# EAGLE board lv2-recovery (EAGLE 4.09), part 1 of 2
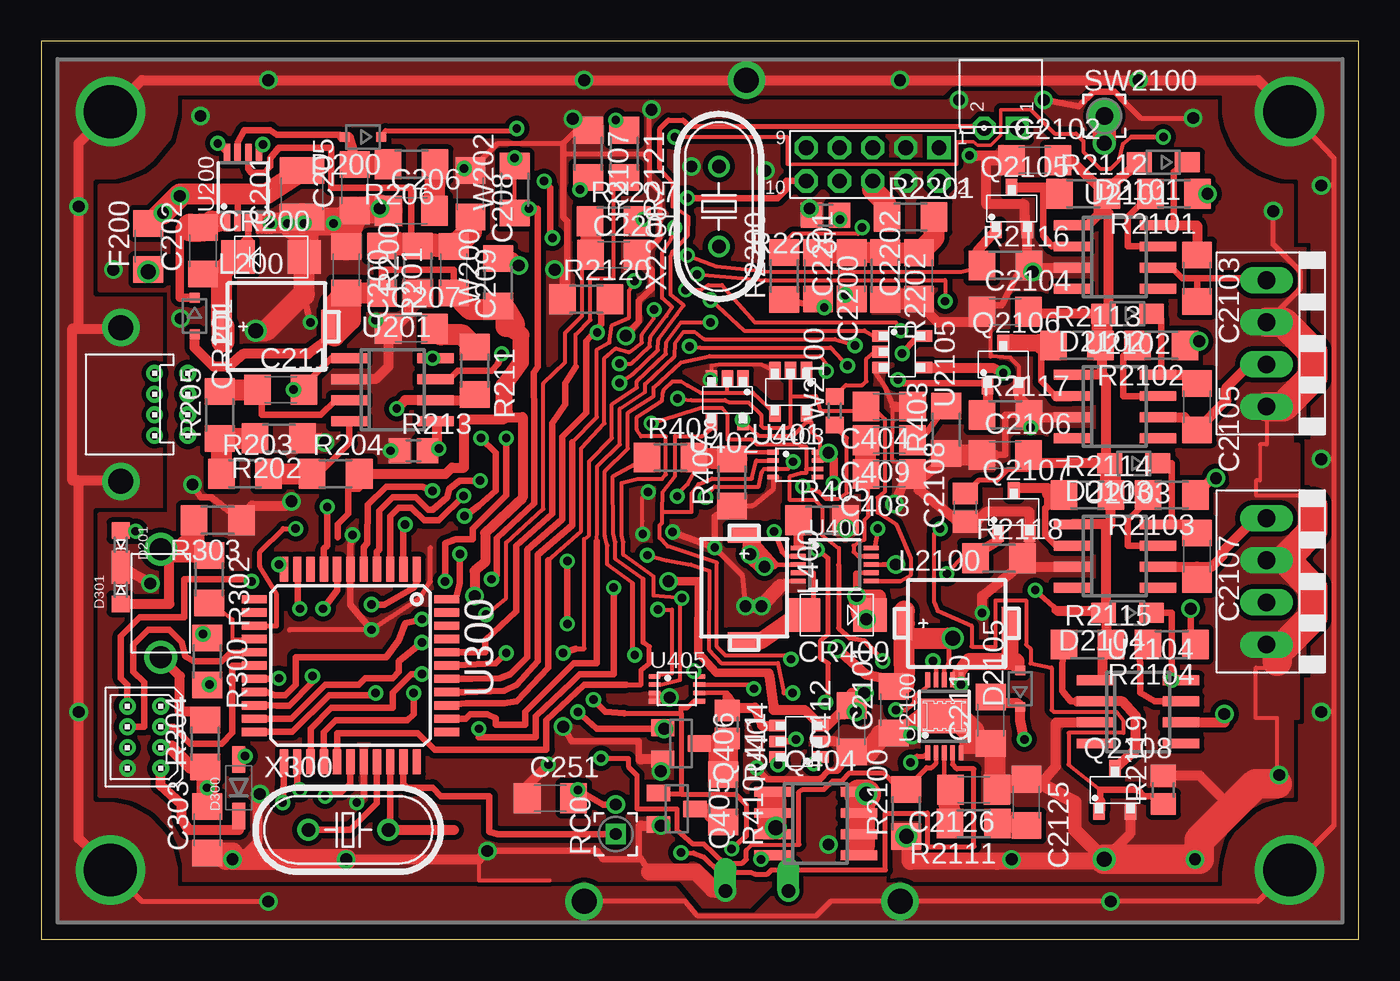
[diagram p0: board, top side]
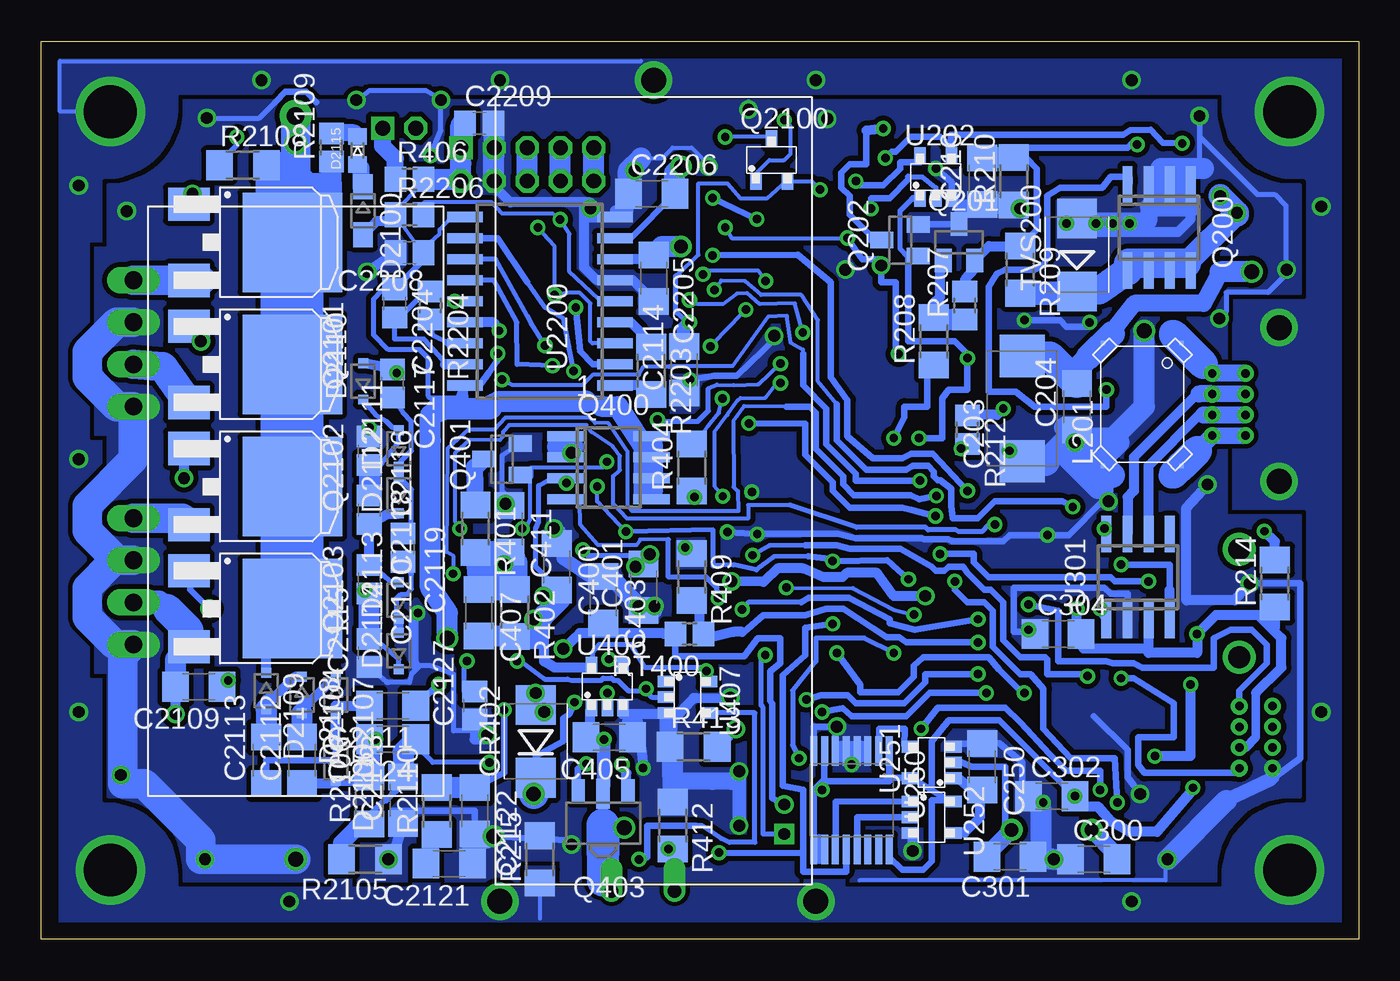
[diagram p1: board, bottom side, seen from below]

Size 79.43 x 54.14 mm. Coordinates in mm from the lower left corner, seen from the top.
Outline: 0,0 79.43,0 79.43,54.14 0,54.14 0,0
Copper layers used: Top, Bottom
tKeepout: area 72.1,46.7 to 78.4,53.1; area 72.1,1 to 78.4,7.4; area 1,46.7 to 7.3,53.1; area 1,1 to 7.3,7.4
tRestrict: 5 lines

## Footprints (pad centres in the part's own frame; a part is rotated, then mirrored left to right if it is on the bottom)
UF611948 = drill 0.813 pad 1.27 offset: B+ -24.13,2.54; B- -24.13,-1.27
C1206 = smd 1.6 x 1.8: 1 -1.4,0; 2 1.4,0
C1210 = smd 1.6 x 2.7: 1 -1.4,0; 2 1.4,0
D/7343-31R = smd 2.55 x 2.7: + 3.175,0; - -3.175,0
230C1B106K = drill 0.889 round: 1 -21.59,0; 2 21.59,0
C0805 = smd 1.3 x 1.5: 1 -0.85,0; 2 0.85,0
JST-08R-JED = drill 0.508 pad 1.016 round: 1 1.875,1; 2 1.875,-1; 3 0.625,1; 4 0.625,-1; 5 -0.625,1; 6 -0.625,-1; 7 -1.875,1; 8 -1.875,-1
PHEONIX-2.54-PITCH-EUROBLOCK = drill 1.067 long: 1 0,3.81; 2 0,1.27; 3 0,-1.27; 4 0,-3.81
CAN_NODE = drill 0.508 pad 1.016 round: B+@1 2,1.875; B+@2 0,1.875; B-@7 2,-1.875; B-@8 0,-1.875; CANH@3 2,0.625; CANH@4 0,0.625; CANL@5 2,-0.625; CANL@6 0,-0.625 | drill 1.511 round: CHASSIS@1 -2.032,4.636; CHASSIS@2 -2.032,-4.636
2MM-2X5-HEADER = drill 0.889 pad 1.321 square: 1 -4,-1 | drill 0.889 pad 1.321 octagon: 2 -4,1; 3 -2,-1; 4 -2,1; 5 0,-1; 6 0,1; 7 2,-1; 8 2,1; 9 4,-1; 10 4,1
NMINIP2-J1 = smd 2 x 2: A 2,0; C -2,0
SOD323-R = smd 0.6 x 0.6: A 1.1,0; C -1.1,0
NMINIP2-J1@1 = smd 2 x 2: A 2,0; K -2,0
SMB = smd 2.4 x 2.4: 1 -2.2,0; 2 2.2,0
0603-DIODE = smd 1 x 1.1: A -0.85,0; K 0.85,0
SOD-123-DIODE = smd 1.6 x 0.8: 1(CATHODE) -1.7,0; 2(ANODE) 1.7,0
SOD323-W = smd 1.5 x 1.2: A 1.45,0; C -1.45,0
1206 = smd 1.6 x 1.8: 1 -1.4,0; 2 1.4,0
2MM-1X2-RIGHTANGLE-RECEPTACLE = drill 0.889 square: 1 0,-1 | drill 0.889 octagon: 2 0,1
MP2A = smd 1.05 x 2: P1 -3.225,0; P2 3.225,0
CMS1 = smd 0.254 x 0.254: 1 3.708,-2.362; 2 3.708,2.362; 3 -3.708,2.362; 4 -3.708,-2.362
SO8 = smd 0.6 x 2.2: 1 -1.905,-2.6; 2 -0.635,-2.6; 3 0.635,-2.6; 4 1.905,-2.6; 5 1.905,2.6; 6 0.635,2.6; 7 -0.635,2.6; 8 -1.905,2.6
SOT23 = smd 1 x 1.4: 1 -0.95,-1.1; 2 0.95,-1.1; 3 0,1.1
SO8@1 = smd 0.6 x 2.2: 1 -1.905,-2.6; 2 -0.635,-2.6; 3 0.635,-2.6; 4 1.905,-2.6; 5 1.905,2.6; 6 0.635,2.6; 7 -0.635,2.6; 8 -1.905,2.6
SOT89 = smd 0.8 x 1.4: 1 -1.499,-1.981; 3 1.499,-1.981 | smd 0.8 x 1.8: 2 0,-1.8
SOT23-3 = smd 0.7 x 1: 1 -0.95,-1.3; 2 0.95,-1.3; 3 0,1.3
TO-252 = smd 2 x 2.5: 1 -2.3,-2.25; 3 2.3,-2.25 | smd 6 x 6: 4 0,4
R1206 = smd 1.6 x 1.803: 1 -1.422,0; 2 1.422,0
R0805 = smd 1.3 x 1.5: 1 -0.85,0; 2 0.85,0
PAD_SQUARE_APC-FREE_0.1/028 = drill 0.711 pad 1.168 square: PAD 0,0
SW_6X3.5MM = drill 1.321 round: 1 -3.25,0; 2 3.25,0
PAD_ROUND_APC-FREE_0.1/042 = drill 1.067 pad 1.93 round: PAD 0,0
SMB' = smd 2.4 x 2.4: A 2.2,0; C -2.2,0
MSOP8 = smd 0.4 x 1.2: 1 -0.975,-2.05; 2 -0.325,-2.05; 3 0.325,-2.05; 4 0.975,-2.05; 5 0.975,2.05; 6 0.325,2.05; 7 -0.325,2.05; 8 -0.975,2.05
SOT23-5 = smd 0.7 x 1: 1 -0.95,-1.3; 2 0,-1.3; 3 0.95,-1.3; 4 0.95,1.3; 5 -0.95,1.3
TSSOP-16 = smd 0.42 x 1.78: 1 -2.275,-2.97; 2 -1.625,-2.97; 3 -0.975,-2.97; 4 -0.325,-2.97; 5 0.325,-2.97; 6 0.975,-2.97; 7 1.625,-2.97; 8 2.275,-2.97; 9 2.275,2.97; 10 1.625,2.97; 11 0.975,2.97; 12 0.325,2.97; 13 -0.325,2.97; 14 -0.975,2.97; 15 -1.625,2.97; 16 -2.275,2.97
TQFP44 = smd 1.5 x 0.5: 1 -5.8,4; 2 -5.8,3.2; 3 -5.8,2.4; 4 -5.8,1.6; 5 -5.8,0.8; 6 -5.8,0; 7 -5.8,-0.8; 8 -5.8,-1.6; 9 -5.8,-2.4; 10 -5.8,-3.2; 11 -5.8,-4; 23 5.8,-4; 24 5.8,-3.2; 25 5.8,-2.4; 26 5.8,-1.6; 27 5.8,-0.8; 28 5.8,0; 29 5.8,0.8; 30 5.8,1.6; 31 5.8,2.4; 32 5.8,3.2; 33 5.8,4 | smd 0.5 x 1.5: 12 -4,-5.8; 13 -3.2,-5.8; 14 -2.4,-5.8; 15 -1.6,-5.8; 16 -0.8,-5.8; 17 0,-5.8; 18 0.8,-5.8; 19 1.6,-5.8; 20 2.4,-5.8; 21 3.2,-5.8; 22 4,-5.8; 34 4,5.8; 35 3.2,5.8; 36 2.4,5.8; 37 1.6,5.8; 38 0.8,5.8; 39 0,5.8; 40 -0.8,5.8; 41 -1.6,5.8; 42 -2.4,5.8; 43 -3.2,5.8; 44 -4,5.8
LTMSOP10 = smd 0.279 x 0.9: 1 -1,-2.2; 2 -0.5,-2.2; 3 0,-2.2; 4 0.5,-2.2; 5 1,-2.2; 6 1,2.2; 7 0.5,2.2; 8 0,2.2; 9 -0.5,2.2; 10 -1,2.2
SSOP-8P-0.50A = smd 0.279 x 0.7: 1 -0.75,-1.35; 2 -0.25,-1.35; 3 0.25,-1.35; 4 0.75,-1.35; 5 0.75,1.35; 6 0.25,1.35; 7 -0.25,1.35; 8 -0.75,1.35
SOT23-6 = smd 0.7 x 1: P1 -0.95,-1.3; P2 0,-1.3; P3 0.95,-1.3; P4 0.95,1.3; P5 0,1.3; P6 -0.95,1.3
LTMSOP10+ = smd 0.279 x 0.9: 1 -1,-2.2; 2 -0.5,-2.2; 3 0,-2.2; 4 0.5,-2.2; 5 1,-2.2; 6 1,2.2; 7 0.5,2.2; 8 0,2.2; 9 -0.5,2.2; 10 -1,2.2 | smd 2.794 x 2.083: P$1 0,0
SOP.3_18 = smd 0.61 x 2.159: 1 -5.08,-4.521; 2 -3.81,-4.521; 3 -2.54,-4.521; 4 -1.27,-4.521; 5 0,-4.521; 6 1.27,-4.521; 7 2.54,-4.521; 8 3.81,-4.521; 9 5.08,-4.521; 10 5.08,4.521; 11 3.81,4.521; 12 2.54,4.521; 13 1.27,4.521; 14 0,4.521; 15 -1.27,4.521; 16 -2.54,4.521; 17 -3.81,4.521; 18 -5.08,4.521
ZJ-1206 = smd 1.6 x 1.803: 1 -1.422,0; 2 1.422,0
R0603 = smd 1 x 1.1: 1 -0.85,0; 2 0.85,0
HC49U70 = drill 0.813 round: 1 -2.413,0; 2 2.413,0

## Placement (x,y rotation side)
B1  UF611948  [UF611948]  42.51,27.05 90 bottom
C200  22  [C1206]  18.38,40.38 270 top
C201  10  [C1210]  15.71,44.95 90 top
C202  0.1  [C1206]  9.74,41.52 90 top
C203  33  [D/7343-31R]  20.28,32 90 bottom
C204  .33  [C1206]  16.98,32.13 90 bottom
C205  CAP-NP1206  [C1206]  18.89,45.33 90 top
C206  CAP-NP1206  [C1206]  22.31,43.94 0 top
C207  .68  [C1206]  22.31,36.83 0 top
C208  [C1206]  25.87,44.95 270 top
C209  [C1206]  24.85,40.38 270 top
C210  .1  [C1206]  22.7,45.72 90 bottom
C211  [C1206]  14.44,33.14 0 top
C250  ???  [C1206]  22.7,10.41 270 bottom
C251  [C1206]  30.7,8.5 0 top
C300  [C1206]  15.96,4.82 0 bottom
C301  [C1206]  21.02,4.97 180 bottom
C302  [C1206]  18.5,8.63 0 bottom
C303  [C1206]  9.99,6.6 90 top
C304  [C1206]  18.12,18.41 0 bottom
C400  CAP-NP1206  [C1206]  48.35,22.47 270 bottom
C401  CAP-NP1206  [C1206]  43.12,21.23 90 bottom
C403  CAP-NP1206  [C1206]  45.55,20.47 270 bottom
C404  CAP-NP1206  [C1206]  51.12,32.13 180 top
C405  10  [C1206]  45.17,12.19 180 bottom
C407  CAP-NP1206  [C1206]  53.05,19.68 270 bottom
C408  CAP-NP1206  [C1206]  51.12,28.06 180 top
C409  CAP-NP1206  [C1206]  51.12,30.09 180 top
C411  CAP-NP1206  [C1206]  51.22,24.76 270 bottom
C412  CAP-NP1206  [C1206]  48.86,12.69 90 top
C2100  10  [230C1B106K]  64.1,26.41 270 bottom
C2101  CAP-NP1206  [C1206]  51.4,13.84 90 top
C2102  .1  [C1206]  59.91,46.98 0 top
C2103  .33  [C1206]  69.68,39.87 270 top
C2104  .1  [C1206]  58.13,37.84 0 top
C2105  .33  [C1206]  69.68,32.13 270 top
C2106  .1  [C1206]  58.13,29.2 0 top
C2107  .33  [C1206]  69.68,23.11 270 top
C2108  .1  [C0805]  55.72,26.03 90 top
C2109  .33  [C1206]  69.94,15.23 180 bottom
C2110  .22  [C1206]  57.24,13.2 90 top
C2111  .22  [C1206]  58.26,14.09 180 bottom
C2112  .22  [C1206]  63.72,10.79 90 bottom
C2113  .22  [C1206]  65.88,10.79 90 bottom
C2114  .01  [C1206]  40.65,34.34 90 bottom
C2115  CAP-NP0805  [C0805]  59.65,17.27 90 bottom
C2116  CAP-NP0805  [C0805]  59.65,29.46 270 bottom
C2117  CAP-NP0805  [C0805]  58.26,33.52 270 bottom
C2118  CAP-NP0805  [C0805]  59.65,25.9 270 bottom
C2119  CAP-NP0805  [C0805]  57.62,23.62 270 bottom
C2120  CAP-NP0805  [C0805]  59.65,21.71 270 bottom
C2121  [C1206]  54.83,4.57 180 bottom
C2122  [C1206]  53.3,7.74 270 bottom
C2123  [C1206]  57.62,8.38 90 bottom
C2124  [C1206]  58.26,12.06 180 bottom
C2125  [C1206]  59.4,8.25 270 top
C2126  [C1206]  56.22,9.01 180 top
C2127  CAP-NP0805  [C0805]  53.3,14.09 90 bottom
C2200  [C1206]  46.83,40 270 top
C2201  [C1206]  48.86,40 90 top
C2202  [C1206]  52.92,40 90 top
C2204  [C0805]  58.13,38.35 270 bottom
C2205  [C1206]  42.51,39.87 270 bottom
C2206  [C1206]  42.63,44.95 0 bottom
C2207  [C1206]  34.51,41.27 0 top
C2208  [C0805]  57.24,41.4 180 bottom
C2209  [C0805]  53.02,49.22 0 bottom
CF300  ICD  [JST-08R-JED]  6.18,12.19 270 top
CF2100  [PHEONIX-2.54-PITCH-EUROBLOCK]  73.88,35.94 180 top
CF2101  [PHEONIX-2.54-PITCH-EUROBLOCK]  73.88,21.59 180 top
CM200  CAN  [CAN_NODE]  6.82,32.25 0 top
CM2200  2m Radio  [2MM-2X5-HEADER]  50.13,46.73 180 top
CR200  MA2Q705  [NMINIP2-J1]  13.86,41.14 0 top
CR201  BAV16W  [SOD323-R]  9.23,37.59 270 top
CR400  MA2Q705  [NMINIP2-J1@1]  47.97,19.55 180 top
CR402  [SMB]  49.62,11.93 90 bottom
D200  [SOD323-R]  19.39,48.38 180 top
D201  LED-GRN-  [0603-DIODE]  4.79,23.79 270 top
D300  [SOD-123-DIODE]  11.9,9.14 90 top
D301  LED-RED-0603  [0603-DIODE]  4.79,21.08 90 top
D2100  BAV21W  [SOD323-W]  60.03,43.94 270 bottom
D2101  BAV21W  [SOD323-W]  67.65,46.86 180 top
D2102  BAV21W  [SOD323-W]  65.49,37.71 180 top
D2103  BAV21W  [SOD323-W]  65.88,28.7 180 top
D2104  BAV21W  [SOD323-W]  65.49,19.68 180 top
D2105  1N4448  [SOD323-R]  59.02,15.11 90 top
D2106  1N4448  [SOD323-R]  61.68,10.66 270 bottom
D2107  1N4448  [SOD323-R]  61.68,14.73 270 bottom
D2108  1N4448  [SOD323-R]  63.72,14.73 270 bottom
D2109  1N4448  [SOD323-R]  65.88,14.98 270 bottom
D2110  1N4448  [SOD323-R]  60.03,33.65 90 bottom
D2111  1N4448  [SOD323-R]  57.87,29.59 90 bottom
D2112  1N4448  [SOD323-R]  57.87,26.79 90 bottom
D2113  1N4448  [SOD323-R]  57.87,20.44 90 bottom
D2114  1N4448  [SOD323-R]  57.87,17.39 90 bottom
D2115  LED-RED-0603  [0603-DIODE]  60.36,47.57 90 bottom
F200  1A  [1206]  6.44,41.78 90 top
J400  [2MM-1X2-RIGHTANGLE-RECEPTACLE]  57.85,48.91 90 top
L200  [MP2A]  14.19,36.95 0 top
L201  CMS1  [CMS1]  13.04,32.25 90 bottom
L400  [MP2A]  42.38,21.2 270 top
L2100  [MP2A]  55.21,19.04 0 top
Q200  IRF7455  [SO8]  12.03,42.92 180 bottom
Q201  [SOT23]  24.09,42.03 0 bottom
Q202  ZXMN2A01F  [SOT23]  27.65,42.16 90 bottom
Q400  Si4435  [SO8@1]  45.22,28.44 270 bottom
Q401  ZXMN2A01F  [SOT23]  51.65,28.95 90 bottom
Q403  FCX717  [SOT89]  45.55,6.98 180 bottom
Q404  Si4435  [SO8]  46.7,6.98 270 top
Q405  ZXMN2A01F  [SOT23]  38.32,7.87 270 top
Q406  ZXMN2A01F  [SOT23]  38.57,11.81 270 top
Q2100  ZVN3320  [SOT23-3]  35.4,46.98 0 bottom
Q2101  IRLR3410  [TO-252]  68.29,42.03 270 bottom
Q2102  IRLF3410  [TO-252]  68.29,34.67 270 bottom
Q2103  IRLR3410  [TO-252]  68.29,27.3 270 bottom
Q2104  IRLR3410  [TO-252]  68.29,19.93 270 bottom
Q2105  ZXMN2A01F  [SOT23-3]  58.51,44.06 0 top
Q2106  ZXMN2A01F  [SOT23-3]  58,34.67 0 top
Q2107  ZXMN2A01F  [SOT23-3]  58.64,25.78 0 top
Q2108  ZXMN2A01F  [SOT23-3]  64.73,9.01 0 top
R200  [R1206]  22.7,40.38 90 top
R201  [R1206]  20.54,40.38 270 top
R202  [R1206]  14.31,30.22 180 top
R203  [R1206]  12.28,28.06 0 top
R204  [R1206]  17.74,28.06 0 top
R205  [R1206]  10.76,31.62 90 top
R206  [R1206]  22.31,46.73 180 top
R207  [R0805]  23.74,38.22 90 bottom
R208  [R1206]  25.62,36.06 90 bottom
R209  60.4k  [R1206]  20.41,40.38 270 bottom
R210  10.0k  [R1206]  20.79,45.72 90 bottom
R211  [R1206]  26.12,34.29 270 top
R212  [R0805]  23.58,30.73 270 bottom
R213  [R0805]  22.44,29.46 0 top
R214  [R1206]  5.04,21.46 90 bottom
R215  100k  [R1206]  49.37,4.82 90 bottom
R300  [R1206]  9.99,16.76 270 top
R302  [R1206]  10.12,21.71 270 top
R303  [R1206]  10.63,25.27 180 top
R304  [R1206]  9.87,11.81 90 top
R401  [R1206]  53.25,24.76 270 bottom
R402  [R1206]  50.89,19.68 270 bottom
R403  [R1206]  54.57,30.73 90 top
R404  [R1206]  40.22,28.44 90 bottom
R405  [R1206]  47.08,25.27 0 top
R406  [R0805]  57.24,45.84 0 bottom
R407  [R1206]  41.64,27.55 90 top
R408  [R1206]  37.94,29.05 0 top
R409  [R1206]  40.22,21.84 270 bottom
R410  [R1206]  41.11,8.5 270 top
R411  [R0805]  41.36,12.95 270 top
R412  [R1206]  41.36,6.85 270 bottom
R413  [R1206]  40.09,11.6 0 bottom
R2100  [R1206]  52.16,7.62 90 top
R2101  [R1206]  68.29,44.95 180 top
R2102  [R1206]  67.53,35.81 180 top
R2103  [R1206]  68.16,26.79 180 top
R2104  [R1206]  68.16,17.77 180 top
R2105  [R1206]  59.91,4.82 180 bottom
R2106  [R1206]  59.65,8.38 90 bottom
R2107  [R1206]  32.98,47.37 270 top
R2108  [R1206]  67.27,46.68 0 bottom
R2109  [R0805]  61.94,47.75 90 bottom
R2110  [R1206]  55.59,7.74 90 bottom
R2111  [R1206]  56.22,6.98 180 top
R2112  [R1206]  62.83,44.95 0 top
R2113  [R1206]  62.45,35.81 0 top
R2114  [R1206]  63.08,26.79 0 top
R2115  [R1206]  63.08,17.77 0 top
R2116  [R1206]  58.13,40.64 0 top
R2117  [R1206]  58.13,31.62 0 top
R2118  [R1206]  57.75,22.98 0 top
R2119  [R0805]  67.65,9.01 90 top
R2120  [R1206]  32.85,38.6 0 top
R2121  [R1206]  35.14,47.37 270 top
R2200  [R1206]  44.79,40 90 top
R2201  [R1206]  52.41,43.56 0 top
R2202  [R1206]  50.89,40 270 top
R2203  [R1206]  42.66,34.29 270 bottom
R2204  [R0805]  55.97,38.22 270 bottom
R2205  [R0805]  47.28,43.66 180 top
R2206  [R0805]  57.24,43.68 0 bottom
R2207  [R1206]  34.51,43.3 0 top
RC0  CONN_JUMPPOINT  [PAD_SQUARE_APC-FREE_0.1/028]  34.63,6.34 90 top
RT400  RESISTOR0805  [R0805]  40.35,18.41 180 bottom
SW300  SW_MOMENTARY-6X3.5MM  [SW_6X3.5MM]  7.2,20.26 90 top
SW2100  [PAD_ROUND_APC-FREE_0.1/042]  64.1,49.65 0 top
TVS200  SMBJ18A  [SMB']  16.98,41.27 90 bottom
U200  LT1767EMS8  [MSOP8]  12.15,45.33 0 top
U201  LTC1442  [SO8]  21.17,33.14 270 top
U202  HC02  [SOT23-5]  25.49,45.97 0 bottom
U250  HC161  [TSSOP-16]  30.57,8.38 180 bottom
U251  [SOT23-5]  25.74,10.66 90 bottom
U252  [SOT23-5]  25.74,7.36 270 bottom
U300  PIC18F458  [TQFP44]  18.63,16.5 270 top
U301  CANBUS  [SO8]  13.3,21.84 0 bottom
U400  IC_LT3401  [LTMSOP10]  47.84,22.6 270 top
U401  NC7SZ14  [SOT23-5]  45.17,33.02 180 top
U402  NC7SZ14  [SOT23-5]  41.36,32.51 180 top
U403  '74  [SSOP-8P-0.50A]  45.45,28.62 270 top
U404  LTC1734  [SOT23-6]  45.68,11.93 90 top
U405  IC_TC7W53FK  [SSOP-8P-0.50A]  38.32,15.11 270 top
U406  TC4S66F  [SOT23-5]  45.3,15.23 0 bottom
U407  NC7SZ14  [SOT23-5]  40.48,14.6 270 bottom
U2100  LT1310  [LTMSOP10+]  54.45,13.46 0 top
U2101  IC_IR2118S  [SO8]  64.73,41.14 270 top
U2102  IC_IR2118S  [SO8]  64.73,32.13 270 top
U2103  IC_IR2118S  [SO8]  64.73,23.11 270 top
U2104  IC_IR2118S  [SO8]  66.13,13.71 270 top
U2105  HC126  [SOT23-5]  51.91,35.43 270 top
U2200  HT9170D  [SOP.3_18]  49.37,38.48 90 bottom
W200  [R1206]  27.55,39.62 90 top
W202  JUMPER_ZEROOHM1206  [ZJ-1206]  28.54,45.21 90 top
W2100  JUMPER_PCBR0603  [R0603]  47.84,31.87 90 top
X300  [HC49U70]  18.5,6.6 0 top
X2200  [HC49U70]  40.86,44.19 90 top

## Library data of the parts
B1 CR200 F200 Q200 Q404 = custom
C200-C202 C204-C211 C250 C251 C400 C401 C403-C405 C407-C409 C411 C412 C2101-C2127 RT400 = discrete-smd-ipc
C203 C300-C304 C2200-C2202 C2204-C2209 R200-R215 R300 R302-R304 R401-R413 R2100-R2121 R2200-R2207 W200 = rcl
C2100 CF300 CF2100 CF2101 CM200 CM2200 CR400 D201 D300 D301 D2115 J400 L200 L201 L400 L2100 Q400 Q403 Q2100-Q2108 RC0 SW300 SW2100 U201 U202 U250-U252 U300 U301 U400-U403 U405-U407 U2100-U2105 U2200 W202 W2100 = psas_eagle_library
CR201 D200 D2100-D2114 TVS200 = diode
CR402 Q201 = semicon-smd-ipc
Q202 Q401 Q405 Q406 = transistor-small-signal
U200 U404 = custom-linear-technology
X300 X2200 = crystal

## Nets
2100_CT: C2127.2 U2100.9
2100_PLL: C2126.2 R2111.2 U2100.3
2100_PLL_2: C2125.2 R2111.1
2100_VC: C2122.1 R2110.2 U2100.10
2100_VC_2: C2121.2 R2110.1
2100_VSW: C2111.1 D2105.A L2100.P2 U2100.7
AUDIO_GND: CM2200.7 CM2200.8
AUDIO_IN: CM2200.5 CM2200.6 R2201.1
B+: CM200.B+@1 CM200.B+@2 L201.1
B-: CM200.B-@7 CM200.B-@8 L201.4
BATT_PROG: R411.1 U404.P4 U405.6
BIN: C203.+ C204.2 F200.1 L201.2
BOOST: C202.2 CR201.C U200.1
CANH: CM200.CANH@3 CM200.CANH@4 U301.7
CANL: CM200.CANL@5 CM200.CANL@6 U301.6
CHASSIS: CM200.CHASSIS@1 CM200.CHASSIS@2 R215.1
DRIVE: Q403.1 U404.P6
DTMF_EST: R2204.2 U2200.16
DTMF_GS: C2201.1 R2200.2 U2200.3
DTMF_RT: C2204.2 R2204.1 U2200.17
DTMF_VN: C2200.2 R2200.1 U2200.2
DTMF_VN_FILT: C2200.1 C2201.2 C2202.2 R2201.2 R2202.1
DTMF_VP: R2203.2 U2200.1
DTMF_VREF: R2203.1 U2200.4
DTMF_XI: C2205.1 U2200.7 X2200.1
DTMF_XO: C2206.2 U2200.8 X2200.2
DVB1: C2111.2 C2113.1 D2106.C D2107.A
DVB2: C2113.2 D2108.C D2109.A
FAST_POINT: Q405.3 R410.2
FB: C208.2 C209.1 R200.2 R201.1 U200.6
FB+: R203.2 R204.1 U201.4
FB-: C211.1 R205.2 U201.3
FB-2: R202.2 R203.1 R205.1
GND: B1.B- C200.1 C201.1 C203.- C204.1 C205.1 C206.1 C207.1 C208.1 C210.1 C250.1 C251.1 C300.1 C301.1 C302.1 C303.1 C304.1 C400.1 C401.1 C403.1 C404.1 C405.1 C408.1 C411.1 C412.1 C2100.2 C2101.1 C2102.1 C2104.1 C2106.1 C2108.1 C2110.1 C2114.1 C2115.1 C2116.1 C2121.1 C2122.2 C2123.1 C2125.1 C2126.1 C2127.1 C2202.1 C2205.2 C2206.1 C2207.2 C2208.2 C2209.2 CF300.2 CF2100.1 CF2100.3 CF2101.1 CF2101.3 CM2200.3 CM2200.4 CR200.A D201.K D301.K L201.3 Q200.3 Q201.3 Q202.2 Q401.2 Q405.2 Q406.2 Q2105.2 Q2106.2 Q2107.2 Q2108.2 R200.1 R202.1 R210.1 R213.1 R215.2 R303.1 R403.1 R405.2 R407.1 R409.1 R412.1 R413.1 R2100.1 R2105.1 R2107.1 R2116.2 R2117.2 R2118.2 R2119.2 R2120.1 R2202.2 R2205.2 TVS200.A U200.4 U201.2 U202.3 U250.3 U250.4 U250.5 U250.6 U250.8 U251.3 U252.3 U300.6 U300.29 U301.2 U400.5 U401.3 U402.3 U403.4 U404.P2 U405.3 U405.4 U406.3 U407.3 U2100.5 U2101.3 U2102.3 U2103.3 U2104.3 U2105.3 U2200.6 U2200.9
HAP_FB: C407.1 C411.2 R401.2 R402.1 U400.8
HAP_GOOD: U402.4 U403.2 U406.4
HAP_GOOD\: Q400.4 U401.4 U402.2 U405.2
HAP_PD_TRIGGER: J400.2 R407.2 R408.2 U403.1
HAP_PGOOD: C404.2 R404.2 U400.6 U401.2
HAP_RT: R405.1 U400.1
HAP_SHDN\: Q401.1 R404.1 U400.10 U403.3
HAP_SW: CR400.A L400.P2 U400.4
HAP_VC: C408.2 C409.2 U400.9
HAP_VC_FILTER: C409.1 R403.2
HO_2101: R2101.2 U2101.7
HO_2102: R2102.2 U2102.7
HO_2103: R2103.2 U2103.7
HO_2104: R2104.2 U2104.7
HYST: R212.2 R213.2 U201.5
IBAT: Q403.3 U404.P1
IN_2101: Q2105.3 R2112.1 U2101.2
IN_2102: Q2106.3 R2113.1 U2102.2
IN_2103: Q2107.3 R2114.1 U2103.2
IN_2104: Q2108.3 R2115.1 U2104.2
INH.A-D: R2205.1 R2206.2 U2200.5
J400_PWR: J400.1 R406.1
P_DV1: C2117.1 D2110.A U2105.4
P_DV2: C2117.2 C2119.1 D2111.C D2112.A
P_DV3: C2119.2 D2113.C D2114.A
P_V1: C2116.2 C2118.1 D2110.C D2111.A
P_V2: C2118.2 C2120.1 D2112.C D2113.A
PIC_CANRX: U300.11 U301.4
PIC_CANTX: U300.10 U301.1
PIC_CLKIN: C300.2 U300.30 X300.1
PIC_CLKOUT/10MHZ: C301.2 U251.2 U300.31 X300.2
PIC_LAMP: D301.A R302.1 R303.2 SW300.2
PIC_PWR/HAP: C251.2 C302.2 C303.2 C304.2 C403.2 C2101.2 C2204.1 C2208.1 C2209.1 CF300.3 CM2200.1 CM2200.2 D2100.A L2100.P1 Q400.5 R214.1 R300.1 R304.1 R406.2 R2206.1 RT400.2 U250.1 U250.7 U250.9 U250.10 U250.16 U251.5 U252.5 U300.7 U300.28 U301.3 U2100.8 U2105.5 U2200.10 U2200.18
PIC_RA0/BATT_CURR: U300.19 U405.1
PIC_RA1/BATT_VOLT: U300.20 U406.2
PIC_RA2/BATT_TEMP: R409.2 RT400.1 U300.21
PIC_RA3/PYRO_VOLT: C2114.2 Q2100.2 R2107.2 U300.22
PIC_RA4/SPS_OFF\: R208.1 U300.23
PIC_RA5/RSSI: C2207.1 R2207.1 U300.24
PIC_RB0/DTMF_DV: U300.8 U2200.15
PIC_RB4: U300.14 U301.8
PIC_RB5: R302.2 U300.15
PIC_RB6: CF300.6 U300.16
PIC_RB7: CF300.5 U300.17
PIC_RC0/DTMF_D0: RC0.PAD U300.32 U2200.11
PIC_RC1/DTMF_D1: U300.35 U2200.12
PIC_RC2/DTMF_D2: U300.36 U2200.13
PIC_RC3/DTMF_D3: U300.37 U2200.14
PIC_RC6/TX: CF300.8 U300.44
PIC_RC7/RX: CF300.7 U300.1
PIC_RD0/PYRO_EN: R2120.2 U300.38 U2105.1
PIC_RD1/PYRO_CHRG: R2100.2 U300.39 U2100.2
PIC_RD2/PYRO_MEASURE: R2121.2 U300.40
PIC_RD4/PYRO_IGN1: Q2108.1 R2119.1 U300.2
PIC_RD5/PYRO_IGN2: Q2107.1 R2118.1 U300.3
PIC_RD6/PYRO_IGN3: Q2106.1 R2117.1 U300.4
PIC_RD7/PYRO_IGN4: Q2105.1 R2116.1 U300.5
PIC_RE0/TRICKLE_CHARGE: Q405.1 R412.2 U300.25 U405.5
PIC_RE1/FAST_CHARGE: Q406.1 R413.2 U300.26
PIC_RE2/HAP_OFF: R408.1 U300.27
PIC_VPP: CF300.1 D300.1(CATHODE) U300.18
PWR_LED_A: D201.A R214.2
PYRO1: C2103.2 CF2100.4 Q2101.3 U2101.6
PYRO2: C2105.2 CF2100.2 Q2102.3 U2102.6
PYRO3: C2107.2 CF2101.4 Q2103.3 U2103.6
PYRO4: C2109.2 CF2101.2 Q2104.3 U2104.6
PYRO_FB: C2123.2 C2124.1 R2105.2 R2106.1 U2100.1
PYRO_HV: C2100.1 D2109.C Q2101.4 Q2102.4 Q2103.4 Q2104.4 R2108.2 R2109.1 SW2100.PAD
PYRO_VCC: C2102.2 C2104.2 C2106.2 C2108.2 C2115.2 C2120.2 D2101.A D2102.A D2103.A D2104.A D2114.C R2112.2 R2113.2 R2114.2 R2115.2 U2101.1 U2102.1 U2103.1 U2104.1
PYRO_VOLTAGE_TRICKLER_DIODE: D2115.K R2109.2
PYRO_VOLTAGE_TRICKLER_LAMP: D2100.C D2115.A
Q201_B: Q201.1 R207.1 R208.2
Q401_D: Q401.3 R401.1
Q404_G: Q404.4 U407.4
Q2100_D: Q2100.3 R2108.1
Q2100_G: Q2100.1 R2121.1
Q2101_G: Q2101.1 R2101.1
Q2102_G: Q2102.1 R2102.1
Q2103_G: Q2103.1 R2103.1
Q2104_G: Q2104.1 R2104.1
REF: R211.2 R212.1 U201.6
RSSI: CM2200.9 CM2200.10 R2207.2
SHDN\: C210.2 Q201.2 R207.2 R209.1 R210.2 U200.5
SPS: C200.2 C209.2 C412.2 CR201.A CR402.2 L200.P2 R201.2 R204.2 U404.P3 W200.1
SPS_FAIL: Q202.1 U201.8 U202.1 U403.6 U405.7 U407.2
SPS_OVP: C211.2 Q200.4 U201.1
SPS_SYNC: U200.8 U202.4 W202.2
SW_PWR: R304.2 SW300.1
SYNC: U202.2 U250.12 U400.2 U2100.4 W202.1 W2100.1
SYNC_CLOCK: U250.2 U251.4
SYNC_FB: C250.2 U251.1 U252.4
SYNC_QB: U250.13 U252.2
SYNC_QC: U250.11 U252.1
SYNC_W2100: U2105.2 W2100.2
TRICKLE_POINT: Q406.3 R410.1 R411.2
U201_FILT: C207.2 R211.1
UPS: C400.2 C407.2 CR400.K Q400.3 R402.2 U201.7 U202.5 U400.7 U401.5 U402.5 U403.7 U403.8 U405.8 U406.5 U407.5 W200.2
V_BB: B1.B+ C405.2 Q403.2 Q404.3 U404.P5 U406.1
V_BK: C401.2 CR402.1 L400.P1 Q404.5 U400.3
VB1: C2110.2 C2112.1 C2124.2 D2105.C D2106.A R2106.2
VB2: C2112.2 D2107.C D2108.A
VB_2101: C2103.1 D2101.C U2101.8
VB_2102: C2105.1 D2102.C U2102.8
VB_2103: C2107.1 D2103.C U2103.8
VB_2104: C2109.1 D2104.C U2104.8
VC: C205.2 D200.A R206.2 U200.7
VC_DIODE: D200.C Q202.3
VC_FLT: C206.2 R206.1
VIN: C201.2 F200.2 Q200.5 R209.2 TVS200.C U200.2
VPP_PULLUP: D300.2(ANODE) R300.2
VSW: C202.1 CR200.C L200.P1 U200.3

## Tracks (layer width: path | path; a pad name or v marks a point on that pad's centre or on a via)
2100_CT  (via drill 0.51)
  Top 0.279: 53.95,16.75 U2100.9
  Top 0.305: v53.76,16.78 53.95,16.75
  Bottom 0.305: C2127.2 53.94,14.98 53.94,16.63 v53.76,16.78
2100_PLL
  Top 0.279: 54.45,9.01 U2100.3
  Top 0.305: 54.7,9.01 54.45,9.01
  Top 1.27: C2126.2 54.7,9.01 R2111.2
2100_PLL_2
  Top 1.016: R2111.1 57.37,7 57.37,6.98 59.27,6.98 C2125.2
2100_VC  (via drill 0.51)
  Top 0.279: U2100.10 53.45,15.25 52.92,14.88
  Top 0.305: v51.52,13.84 52.13,13.84 52.67,14.27 52.67,14.62 52.92,14.88
  Bottom 0.406: C2122.1 51.52,10.03 v51.52,13.84
  Bottom 1.27: C2122.1 55.56,9.14 R2110.2
2100_VC_2
  Bottom 1.016: C2121.2 55.97,4.82 55.97,6.34 55.59,6.34 R2110.1
2100_VSW  (via drill 0.51)
  Top 0.279: 55.21,15.66 U2100.7
  Top 0.305: 55.21,15.49 55.21,15.66
  Top 0.406: v55.46,15.36 55.21,15.49
  Top 0.61: D2105.A 59.02,16.38 58.76,16.63
  Top 0.813: 55.97,16.76 55.84,16.76 55.33,16.12 55.21,15.49
  Top 1.016: 56.22,16.76 55.97,16.76 58.38,16.76 | 58.76,16.63 58.76,16.76 58.38,16.76 | L2100.P2 58.43,16.76 58.38,16.76
  Bottom 0.406: C2111.1 56.35,14.6 v55.46,15.36
AUDIO_GND
  Bottom 1.27: CM2200.7 48.13,47.72 CM2200.8
AUDIO_IN
  Top 0.305: 50.13,45.56 CM2200.6
  Top 0.406: 50.13,45.21 50.13,45.56
  Top 1.27: 50.13,45.21 50.89,44.45 50.89,43.43 R2201.1
  Bottom 1.27: CM2200.6 CM2200.5
B+
  Bottom 1.016: CM200.B+@2 CM200.B+@1 | CM200.B+@1 8.85,34.13 8.85,34.16 | CM200.B+@1 8.85,34.16 | 8.85,34.16 9.36,34.67
  Bottom 1.778: 9.36,34.67 10.63,35.94 | 10.63,35.94 L201.1 | 10.63,35.94 11.14,36.44
B-
  Bottom 1.016: CM200.B-@8 8.85,30.35 CM200.B-@7 9.74,29.46
  Bottom 1.778: 9.74,29.46 10.63,28.57 | 10.63,28.57 L201.4 | 10.63,28.57 11.14,28.06
BATT_PROG
  Top 0.279: U405.6 41.36,14.86 41.36,14.6
  Top 0.61: U404.P4 43.46,12.88 43.02,13.96 41.75,13.96 41.36,14.6 R411.1
BIN  (via drill 0.89)
  Top 1.27: F200.1 v6.44,40.25
  Bottom 1.016: L201.2 13.53,38.35 9.36,38.35 8.34,40.25
  Bottom 1.27: v6.44,40.25 8.34,40.25
  Bottom 1.422: C204.2 16.98,34.39 L201.2
  Bottom 1.778: C204.2 18.63,35.17 C203.+
BOOST
  Top 0.254: 10.25,43.28 9.61,43.28 C202.2
  Top 0.406: U200.1 10.25,43.28 10.25,43.3
  Top 0.508: CR201.C 8.34,38.69 8.34,42.92 8.98,42.92
  Top 1.27: 10.25,43.3 10.76,43.3
  Top 1.676: C202.2 9.61,42.92 8.98,42.92
CANH
  Bottom 0.61: U301.7 13.93,26.66 13.55,27.05 13.55,29.08 9.75,32.88 9.61,32.89
  Bottom 1.016: CM200.CANH@4 8.85,32.89 | 8.85,32.89 CM200.CANH@3 | 8.85,32.89 9.61,32.89
CANL
  Bottom 0.61: U301.6 12.66,28.57 9.6,31.63 9.36,31.62
  Bottom 1.016: 8.85,31.62 CM200.CANL@6 | 8.85,31.62 CM200.CANL@5 | 9.36,31.62 8.85,31.62
CHASSIS  (via drill 0.71, 1.51, 3.17)
  Top 0.254: 4.79,36.95 CM200.CHASSIS@1 4.79,36.83 | 4.79,27.68 CM200.CHASSIS@2
  Top 0.305: 77.94,45.46 77.94,47.11 v75.27,49.91 | 77.94,45.46 77.94,28.95 | 77.94,28.95 77.94,13.71 | 77.94,13.71 77.94,6.85 v75.27,4.19 73.37,2.28 v64.48,2.28 v51.78,2.28 | v51.78,2.28 51.65,2.28 | v51.78,2.28 47.59,2.28 46.7,1.39 39.59,1.39 38.82,2.28 v32.73,2.28 | v4.15,4.19 6.06,2.28 v13.68,2.28 | 77.94,13.71 v77.18,13.71 | 77.94,28.95 v77.18,28.95 | 77.94,45.46 v77.18,45.46
  Top 0.61: v4.15,4.19 2.25,6.09 v2.25,13.71 2.25,27.68 | 2.25,27.68 4.79,27.68 | 2.25,27.68 1.87,27.68 1.87,36.83 2.25,36.83 | 2.25,36.83 4.79,36.83 | 2.25,36.83 v2.25,44.19 2.25,48 v4.15,49.91 6.06,51.81 v13.68,51.81 v32.73,51.81 v42.51,51.81 v51.78,51.81 v66.15,51.81 73.37,51.81 v75.27,49.91
  Bottom 0.254: v75.27,49.91 78.32,49.91 78.32,52.95 43.27,52.95 | R215.1 49.37,1.26
  pour Bottom (isolate 0.254, rank 2, no thermals): 0.98,1.01 78.45,1.01 78.45,53.08 0.98,53.08
  pour Top (isolate 0.254, rank 2, no thermals): 0.98,1.01 0.98,53.08 78.45,53.08 78.45,1.01
DRIVE  (via drill 0.51)
  Top 0.61: U404.P6 44.38,10.51 v44.41,10.54
  Bottom 0.61: Q403.1 44.06,8.94 44.16,9.14 44.16,10.03 v44.41,10.54
DTMF_EST
  Bottom 0.305: R2204.2 55.82,36.42 54.83,35.94
  Bottom 0.406: 54.95,35.94 54.83,35.94 U2200.16
DTMF_GS  (via drill 0.51)
  Top 0.254: R2200.2 44.79,42.03 45.3,42.54 49.24,42.54 v49.49,42.92
  Top 0.305: C2201.1 48.73,38.6 v48.48,38.86
  Top 0.406: v48.48,38.86 48.47,38.23
  Bottom 0.254: 48.22,38.86 47.71,38.98 46.95,38.98 46.32,38.35 46.32,36.06 46.19,35.94 U2200.3 | v49.49,42.92 48.48,41.78 v48.48,38.86
  Bottom 0.406: 48.22,38.86 v48.48,38.86
DTMF_RT
  Bottom 0.305: C2204.2 58.13,36.19 56.35,36.19 55.21,34.92 55.21,34.67 55.08,34.67 | R2204.1 56.01,39.33 57.49,37.84 58.26,37.71
  Bottom 0.406: C2204.2 58.13,37.59 58.26,37.71
  Bottom 0.61: U2200.17 55.08,34.67
DTMF_VN  (via drill 0.51)
  Top 0.305: C2200.2 46.83,38.48 v47.21,38.1
  Top 0.406: v47.21,38.1 R2200.1
  Bottom 0.406: v47.21,38.1 46.93,35.45 46.19,34.67 U2200.2
DTMF_VN_FILT
  Top 1.27: R2201.2 53.84,42.31 C2202.2 50.89,41.4 R2202.1 48.88,41.42 C2201.2 C2200.1
DTMF_VP
  Bottom 0.61: R2203.2 42.76,32.89 43.27,33.4 U2200.1
DTMF_VREF
  Bottom 0.61: R2203.1 42.76,36.06 43.9,37.21 U2200.4
DTMF_XI
  Bottom 0.61: U2200.7 42.51,41.02 C2205.1
  Bottom 1.27: C2205.1 42,41.78 X2200.1
DTMF_XO
  Bottom 0.406: U2200.8 43.9,42.29 C2206.2
  Bottom 1.27: C2206.2 41.24,46.22 X2200.2
DVB1
  Bottom 0.406: D2106.C 61.68,10.79 65.88,10.79 C2113.1
  Bottom 0.61: C2111.2 61.68,14.09 D2107.A D2106.C
DVB2
  Bottom 0.61: D2108.C 64.14,15.83 65.49,14.47 65.88,14.47 D2109.A
  Bottom 1.27: C2113.2 D2109.A
FAST_POINT
  Top 0.61: Q405.3 40.35,7.87 40.22,7.74 40.22,7.49 40.6,7.11 41.11,7.11 R410.2
FB
  Top 0.305: 21.55,41.91 21.55,41.93 21.55,42.03 22.31,42.03
  Top 0.406: U200.6 12.48,46.48 12.66,46.22 13.42,46.22 13.8,46.6 13.8,47.11 14.31,47.75 17.49,47.75 17.49,45.33 22.31,45.33 22.31,42.03
  Top 0.61: 21.55,41.93 R201.1
  Top 1.422: C209.1 24.85,41.91 | C209.1 25.87,42.67 C208.2 | C209.1 22.7,41.91 R200.2 21.55,41.93 20.56,41.93 20.54,41.91 R201.1
FB+
  Top 0.406: R204.1 16.73,28.06 18.57,29.91 U201.4
  Top 1.27: 13.68,28.06 R203.2 R204.1
FB-
  Top 0.406: C211.1 13.3,32.25 13.3,31.62 16.85,31.62 17.74,32.51 U201.3
  Top 1.27: 10.76,33.02 R205.2 10.76,33.14 C211.1
FB-2
  Top 1.27: R203.1 10.88,28.06 10.88,30.07 R205.1 10.78,30.22 R202.2
GND  (via drill 0.51, 0.71, 0.89)
  Top 0.203: 73.49,29.84 73.49,27.68
  Top 0.254: 15.2,43.05 15.07,43.18 | U200.4 13.04,43.2 13.04,42.67 13.3,42.67 13.55,42.92 13.55,43.18 | 51.35,32.15 51.32,28.82 52.39,28.57 | 36.97,14.39 U405.3 | Q2106.2 58.95,34.53 58.43,35.07 57.24,35.15 57.24,38.22 | U401.3 44.19,34.32 44.16,34.29 43.4,34.67 40.86,34.67 40.41,34.61 U402.3 40.38,33.78 40.35,33.78 40.35,33.65 v40.32,33.75 | 44.16,27.77 U403.4 | 35.4,36.57 v35.24,36.39 | C2207.2 | C2126.1 58,9.39 60.29,9.39 | C2100.2 v58.51,4.82 | v36.26,24.43 36.23,25.22 36.23,26.61 v36.59,26.97 | 76.67,26.16 76.03,26.79 73.24,26.79 73.24,27.68 73.49,27.68 | 73.49,29.84 73.88,29.84 CF2100.1 | 74.51,16.38 73.24,16.38 73.24,13.33 74.51,13.33 74.51,9.39 | 26.38,4.82 26.38,3.55 30.65,3.55 | 36.66,50.41 36.79,50.41 v36.79,50.03
  Top 0.279: 44.81,21.6 U400.5 | U2100.5 55.45,11.3 56.6,11.3 | 37.05,14.73 37.17,14.6 36.97,14.39 36.93,14.36 | 36.79,14.53 U405.4 36.93,14.36 | 36.79,14.73 36.92,14.85 36.92,14.47 | 36.93,14.36 36.92,14.35
  Top 0.305: 44.54,21.33 44.81,21.6 | U2105.3 50.28,34.2 50.91,33.27 51.3,32.3 51.47,32.13 | 36.79,14.53 36.79,14.73 | v40.6,23.62 42.25,21.97 v42.46,20.09 | R2205.2 46.48,43.9 v46.32,44.06 | R407.1 41.75,26.16 42.89,26.16 44.16,27.17 44.16,27.77 | C208.1 27.52,48 31.46,48 32.22,48.76 R2107.1 | C2207.2 36.28,41.27 37.3,42.29 37.3,45.08 36.66,45.72 36.66,47.37 | 36.66,47.37 36.66,50.41 | 31.46,47.37 36.66,47.37 | v74.64,9.9 73.24,9.27 71.97,8 71.72,8 | 23.46,23.62 23.46,21.59 22.82,20.57 v19.9,18.66 14.95,18.66 | 65.34,50.49 66.31,49.53 v69.46,49.53 | CF2100.3 75.93,39.26 75.93,40.25 74.28,41.91 v74.28,43.91 | R2107.1 | v32.04,49.47 32.3,49.47 R2107.1
  Top 0.406: 25.36,46.1 C208.1 25.49,46.73 v25.49,46.48 | 18.63,22.22 18.63,20.19 v19.9,18.66 | 18.63,22.22 U300.6 | U300.29 19.43,8.67 v19.01,8.25 | v31.46,12.82 31.97,11.93 36.03,11.93 36.03,10.92 | 36.03,5.08 36.03,4.82 33.87,4.82 33.49,5.33 v26.89,5.33 | R303.1 10.25,26.66 9.61,26.66 v9.11,27.43 | CR200.A 15.8,38.83 v16.22,37.21 | v20.16,37.33 20.16,37.21 20.28,37.21 | C207.1 20.41,37.08 20.28,37.08 20.28,37.21 | 20.28,37.21 20.79,37.21 | v20.41,44.06 C206.1 | v18.76,24.38 18.63,23.74 18.63,22.22 | C2104.1 57.24,38.22 57.9,38.22 59.07,40.48 | R2117.2 58.13,31.62 58.13,29.2 C2106.1 | 36.16,6.85 36.03,6.85 36.03,5.08 | 36.16,10.86 36.03,10.86 | 36.03,10.86 36.03,10.92 | Q406.2 36.03,10.86 | 36.03,5.08 36.66,4.06 | C2110.1 56.6,11.3 | 51.78,12.44 C2101.1 51.78,12.31 | 59.4,42.54 59.4,42.51 Q2105.2 | 46.44,43.43 46.32,43.43 | 51.35,32.15 51.47,32.13 | 52.52,27.68 52.39,28.57 | v37.88,14.57 37.3,14.6 | 36.03,10.92 36.03,10.79 | Q406.2 37.47,10.83 37.43,10.79 36.03,10.92 | v43.14,10.33 43.27,10.15 43.78,9.65 46.95,9.65 47.46,10.15 47.99,10.15 48.2,10.41 48.22,11.81 | Q405.2 37.3,6.79 v37.35,6.85 | 37.43,10.92 37.43,10.86 Q406.2 | 37.43,10.92 v37.35,10.13 37.3,10.79 37.43,10.92 | 37.43,10.92 37.47,10.87 Q406.2 | R407.1 41.21,25.88 40.6,25.52 v40.6,23.62 v38.06,24.56 | 31.46,48 31.46,47.37 31.46,43.56 31.71,43.3 31.71,38.88 R2120.1 31.43,40.38 v30.95,40.38 | 52.16,6.34 v52.16,6.22 R2100.1 | 35.4,36.57 36.01,37.23 36.01,38.5 36.79,39.24 36.79,40.38 C2207.2 | 65.34,50.49 64.73,51.1 63.46,51.1 62.55,50.24 v60.44,50.62
  Top 0.61: C412.1 48.73,11.29 48.22,11.81 47.84,11.93 U404.P2 | 15.8,43.05 15.84,43.05 | 15.84,43.05 v15.84,43.18 | 15.84,43.05 15.96,43.18 | v17.62,43.18 17.74,43.18 18.12,43.3 | R200.1 22.19,38.96 22.19,37.71 21.17,36.7 20.79,36.7 C207.1 20.92,34.54 20.16,33.78 U201.2 | v26.89,5.33 26.38,4.82 v18.38,4.82 | R303.1 12.69,26.16 14.82,26.16 v15.07,26.41 | D301.K 4.83,22.43 v6.57,21.46 | v11.52,4.82 12.03,4.82 13.04,5.84 13.04,8.76 v13.17,8.76 | C251.1 29.3,9.26 v30.57,10.54 | R2116.2 59.07,40.48 59.46,40.44 Q2105.2 | R2116.2 59.65,40.38 59.65,40.51 | 59.65,40.51 U2101.3 | 59.52,31.49 U2102.3 | 59.52,31.49 59.52,31.62 R2117.2 59.55,31.72 59.52,31.75 59.52,32.13 58.95,32.7 Q2106.2 | 59.14,22.73 R2118.2 | 59.14,22.73 59.59,22.79 Q2107.2 59.59,25.78 56.98,25.78 56.48,25.27 55.84,25.27 55.72,25.14 | 59.4,22.47 U2103.3 | 59.4,22.47 59.14,22.73 | 59.52,31.49 59.65,31.36 v59.65,30.86 | 36.16,6.85 v37.35,6.85 37.41,6.85 | Q406.2 36.16,10.86 | v37.88,14.57 37.17,14.6 | 57.62,4.82 57.62,4.69 57.62,4.8 57.59,4.82 | 52.54,4.57 52.16,4.69 52.16,5.96 | U2104.3 61.18,13.08 61.18,10.41 60.29,9.39 | 59.65,40.51 59.65,40.76 | 59.27,44.32 56.98,44.32 56.98,46.98 C2102.1 57.57,47.24 56.35,47.24 v55.97,47.26 | 59.27,44.32 59.4,42.54 59.4,42.41 | R2205.2 46.44,43.43 46.44,43.94 v46.32,44.06 | 59.27,44.32 59.27,43.3 | 53.3,13.46 53.05,13.2 v52.54,12.31 | Q2108.2 65.68,6.41 C2100.2 68.54,4.82 71.72,8 | 69.85,9.86 71.34,8.38 | 69.85,9.86 R2119.2 | 71.72,8 69.85,9.86 | 71.72,8 71.72,7.74 68.8,4.82 | C2106.1 57.49,29.2 | 51.47,32.13 C404.1 | 52.52,27.68 C408.1 52.9,27.68 | 54.32,29.2 54.32,28.82 52.9,27.68 | 52.9,27.68 52.9,27.1 55.05,25.37 55.72,25.14
  Top 0.61: 55.72,25.14 C2108.1 | 52.39,28.57 v51.45,26.26 | 59.4,22.47 58.89,22.47 56.73,20.7 v56.73,19.68 | C2202.1 52.92,38.35 54.06,37.21 56.1,37.21 C2104.1 | v21.04,29.46 R213.1 | 15.71,30.22 R202.1 16.85,30.22 v17.11,29.97 | R2116.2 59.52,40.64 v59.78,40.25
  Top 0.813: 44.54,21.33 v43.42,20.09 v42.46,20.09 | R405.2 48.35,24.89 v48.53,24.79 | 59.4,9.39 60.29,9.39 62.32,8.25 62.32,6.6 C2100.2
  Top 1.016: D301.K D201.K | B1.B- 40.48,3.04 39.46,4.06 36.66,4.06 | C2125.1 59.4,9.39 57.49,9.39 57.37,9.14 C2126.1 | C2100.2 63.97,4.69 57.62,4.69 52.41,4.69
  Top 1.27: C201.1 15.08,43.18 15.07,43.18 v14.82,43.18 v13.8,43.18 13.55,43.18 | v11.52,4.82 v18.38,4.82 | v11.52,4.82 11.14,4.82 11.14,5.2 10.12,5.2 C303.1 11.52,5.2 v11.52,4.82 | 15.8,38.83 15.84,38.83 15.84,38.98 | 15.84,38.98 15.84,40.38 | 15.84,38.98 13.55,36.7 v12.92,36.7 | 55.72,13.08 55.33,13.08 55.97,12.44 55.97,11.93 57.37,11.93 C2110.1 57.49,11.68 | 55.72,13.08 56.22,12.57 | 55.72,13.08 55.33,13.46 53.3,13.46 52.03,12.44 51.91,12.44 51.78,12.31 | C412.1 49.87,11.29 50.63,12.31 51.65,12.31 C2101.1 | R2100.1 52.16,5.96 | 57.49,11.68 57.49,9.39 | 57.49,11.68 57.37,11.81 | R403.1 54.32,29.2 C2106.1 | R2202.2 50.89,38.6 C2202.1
  Top 1.676: C205.1 18.76,43.68 18.12,43.3 16.09,43.3 C201.1 | C205.1 18.38,42.54 C200.1 | C206.1 20.54,43.93 20.54,43.94 v20.41,44.06 18.76,43.94 C205.1
  Top 1.778: CR200.A 15.8,43.05 15.2,43.05 | C2100.2 68.8,4.82 v69.56,4.82 69.81,4.82 69.81,5.96 73.24,9.39 74.51,9.39 | 74.51,16.76 74.51,17.65 74.89,17.65 76.67,19.43 76.67,21.2 75.15,22.73 75.15,23.11 76.67,24.63 76.67,26.16 | CF2100.1 74.89,32.13 76.67,33.9 76.67,35.43 74.89,37.21 CF2100.3
  Bottom 0.254: 56.86,16.25 56.86,16.5 | 58.51,15.49 58.64,15.49 59.52,16.38 59.65,16.38 C2115.1 | C400.1 v48.53,24.79 | 44.03,46.35 v43.65,46.35 | v39.2,46.6 39.2,46.73 40.22,47.75 41.36,47.75 42,47.11 43.27,47.11 | C2114.1 40.22,33.39 v40.32,33.75 | v58.51,4.82 57.75,6.34 57.62,6.47 C2123.1 | v38.06,24.56 36.51,24.51 v36.26,24.43 | 30.09,3.55 11.65,3.55 11.65,4.82 v11.52,4.82 | v36.79,50.03 36.79,50.54 | R215.2 49.37,5.96 47.71,5.96
  Bottom 0.305: 31.46,11.35 31.59,11.35 31.59,11.42 | 31.59,11.42 31.46,11.42 | 31.59,12.69 31.59,11.42 | U250.3 29.8,11.42 | 29.68,11.42 v30.57,10.54 | C2115.1 58.6,15.49 58.51,15.49 57.24,15.49 57.11,16 56.86,16.25 56.6,16.5 55.97,16.5 54.57,16 54.57,12.57 53.3,12.57 53.3,12.06 | Q401.2 51.65,29.18 51.65,27.05 51.27,26.66 | 40.48,23.11 40.22,23.11 40.22,23.24 v40.6,23.62 | v46.32,44.06 46.32,43.56 46.7,44.06 | v55.97,47.26 55.33,48.76 v55.33,50.62 55.28,50.62 56.22,51.18 59.65,51.18 60.34,50.62 v60.44,50.62 | 65.34,50.49 66.31,49.53 v69.46,49.53 | Q200.3 10.54,45.52 9.59,46.48 v9.59,49.65 9.59,48.41 8.7,47.52 | v8.39,37.44 7.99,37.84 7.99,39.01 5.45,39.01 4.33,40.13 v4.33,40.38 4.38,40.43 4.38,44.24 5.07,44.93 6.11,44.93 8.7,47.52 | 8.7,47.52 8.72,47.54
  Bottom 0.406: U202.3 24.54,45.65 v25.49,46.48 | C304.1 19.9,18.03 19.9,18.54 | v19.9,18.66 19.9,18.54 | U301.2 13.93,20.82 14.95,20.82 15.33,21.2 20.79,21.2 20.79,18.54 19.9,18.54 | C302.1 19.39,8.63 v19.01,8.25 19.52,8.25 20.28,9.01 20.28,10.66 21.68,11.81 C250.1 24.25,11.81 U251.3 | U250.8 32.84,12.82 31.54,12.82 U250.6 31.46,11.35 | 31.46,11.35 31.08,11.35 31.08,11.42 | 29.68,11.35 U250.3 31.46,11.35 | 29.68,11.35 30.06,11.35 | 29.68,11.35 29.68,11.42 | 31.46,11.42 31.46,11.35 | 31.59,12.69 31.46,12.69 v31.46,12.82 | v13.17,8.76 13.93,9.77 13.93,11.42 15.96,13.46 | 5.01,9.8 3.52,10.92 3.52,21.46 v6.57,21.46 | v16.22,37.21 16.35,36.95 17.62,36.95 18,37.33 v20.16,37.33 | 17.11,30.22 17.11,30.09 | R210.1 20.79,44.45 20.54,44.45 v20.41,44.06 | Q202.2 26.55,43.09 26.51,43.05 26.42,43.13 Q201.3 | v15.07,26.41 15.46,26.41 17.49,24.38 v18.76,24.38 21.04,24.38 21.43,24 24.5,24 24.75,24.12 26.18,24.12 26.33,24.18 30.32,24.18 31.41,24.45 36.54,24.45 v38.06,24.56 | 40.22,23.24 R409.1 v40.6,23.62 | 52.03,47.75 52.16,47.75 52.14,47.73 | C2121.1 | C2121.1 53.43,5.58 v52.16,6.22 47.71,5.96 v47.46,5.71 | C2121.1 53.43,6.21 C2122.2 53.3,7.74 57.62,7.74 | 57.62,7.74 C2123.1 | 57.62,7.74 58.26,7.74 | 58.38,4.82 R2105.1 v58.51,4.82 | v51.45,26.26 51.27,26.66 50.76,26.16 | 50.76,26.16 50.63,26.16 | 50.76,26.16 C411.1 | 41.62,9.27 41.62,12.95 39.97,14.55 41.36,13.2 41.36,9.9 40.98,9.52 | 38.95,9.52 37.94,9.52 v37.35,10.13 | 47.97,23.75 C400.1 | 47.97,23.74 48.22,24.63 | v40.32,33.75 38.85,33.98 37.5,33.98 35.12,36.27 v35.24,36.39 | 65.34,50.49 64.73,51.1 63.46,51.1 62.85,50.49 | CF300.2 5.18,9.65 5.3,9.65
  Bottom 0.61: 44.41,13.71 44.41,13.96 44.35,13.9 | 41.81,13.65 41.87,13.71 | 41.81,13.65 U407.3 | 41.81,13.65 41.75,13.58 44.41,13.58 44.41,13.71 | 44.35,13.9 44.29,13.84 | 44.35,13.9 U406.3 | 44.41,13.71 43.78,13.08 | 12.66,44.19 Q200.3 12.66,45.97 12.41,45.84 | v15.84,43.18 15.84,42.67 10.88,42.67 10.12,43.43 10.12,44.19 10.12,44.95 10.38,44.95 | TVS200.A 16.98,43.43 17.11,43.3 | U202.3 24.09,44.22 Q201.3 | U252.3 26.89,6.41 v26.89,5.33 | 18.89,28.82 19.65,28.82 20.03,28.44 | L201.3 15.4,28.49 15.46,28.44 15.07,28.06 v15.07,26.41 | v6.57,21.46 7.46,20.44 10.38,20.44 10.38,26.03 v9.11,27.43 | 29.8,11.42 29.68,11.42 | v59.65,30.86 C2116.1 | 41.36,11.55 41.36,13.2 40.48,14.14 40.09,14.55 39.97,14.55 v37.88,14.57 | C2123.1 58,5.71 v58.51,4.82 | 46.06,43.81 v46.32,44.06 46.32,44.45 51.14,44.45 52.14,45.45 52.14,45.72 52.16,45.72 52.14,45.73 CM2200.4 | v52.54,12.31 53.3,13.2 C2127.1 53.3,12.06 52.54,12.06 | C405.1 43.27,11.55 v43.14,10.33 | v56.73,19.68 56.98,19.3 56.98,16.76 56.86,16.5 | C2206.1 44.03,43.94 44.84,43.94 U2200.9 46.44,43.56 46.7,44.06 46.7,40.51 45.94,39.75 U2200.6 43.78,39.75 C2205.2 | C203.- 20.41,28.82 v21.04,29.46 | v17.11,29.97 17.11,30.22 17.11,30.6 C204.1 16.48,30.22 15.07,30.22 | 52.14,47.13 52.13,47.14 52.13,47.27 | 52.14,47.35 52.14,47.13 | 52.14,47.13 52.16,47.11 | v59.78,40.25 58.13,41.4 C2208.2
  Bottom 0.813: R413.1 41.75,11.91 41.75,13.58 | 7.96,8.38 5.3,9.65 5.17,9.77 5.17,10.17 | 24.09,44.22 24.06,44.19 23.07,44.19 C210.1 | 48.22,24.63 48.73,24.25 | v37.35,6.85 v37.35,10.13 37.81,9.52 | 47.97,23.75 47.97,23.74 47.97,22.98 46.06,21.71 45.55,21.97 C403.1
  Bottom 1.016: 12.66,44.19 12.66,43.3 17.11,43.3 | 10.38,45.84 12.41,45.84 12.41,44.95 10.38,44.95 10.38,45.59 11.77,45.59 | 37.81,9.52 38.95,9.52 40.98,9.52 | C403.1 45.18,21.97 v43.42,20.09 v42.46,20.09 42.51,19.81 43.4,19.81 C401.1
  Bottom 1.27: C405.1 43.77,13.07 43.78,13.08 | 16.98,30.47 16.85,30.35 | C204.1 16.98,30.47 | 17.74,30.86 17.36,30.86 16.98,30.47 | C302.1 19.14,7.87 19.14,5.2 | C301.1 19.52,4.82 19.14,5.2 | 19.14,5.2 19.14,4.82 v18.38,4.82 C300.1 | 7.96,8.38 v11.52,4.82 | U250.5 U250.4 | U250.5 31.08,11.35 31.08,11.3 | U250.5 30.06,11.35 30.06,11.3 | v12.92,36.7 12.92,32.13 14.82,30.22 15.07,30.22 16.5,30.22 | C210.1 22.57,44.32 20.69,44.32 R210.1 | R413.1 41.36,11.55 41.36,9.9 R412.1 | v52.16,6.22 53.43,5.84 C2121.1 | 52.13,47.72 52.16,47.75 52.16,49.14 52.17,49.16 C2209.2 | C2206.1 44.03,46.35 43.27,47.11 | 52.14,45.72 52.14,47.35 52.16,47.37 | CM2200.3 52.13,47.27 52.16,47.24 | 9.36,46.48 11.9,46.48 | 10.12,44.19 12.41,44.19 | 14.44,29.97 15.71,28.7 15.71,27.17 17.49,28.95
  Bottom 1.422: L201.3 16.98,30.12 C204.1 18.89,28.82
  Bottom 1.778: 18.89,28.82 C203.- | C2100.2 v69.56,4.82 69.81,4.82 69.81,5.96 73.24,9.39 74.51,9.39 74.51,17.14 CF2101.1 75.02,17.77 76.67,19.43 76.67,21.2 75.15,22.73 75.15,22.86 CF2101.3 74.89,22.86 76.67,24.63 76.67,26.16 73.88,28.95 CF2100.1 74.89,32.13 76.67,33.9 76.67,35.43 74.89,37.21 CF2100.3
  pour Bottom (isolate 0.305, no thermals): 3.52,25.52 7.96,25.52 7.96,29.59 4.79,29.59 4.79,34.92 7.96,34.92 7.96,38.98 3.52,38.98 3.52,45.46 4.66,45.46 5.17,45.59 5.55,45.72 6.44,46.1 7.07,46.6 7.84,47.49 8.22,48 8.6,49.53 8.6,50.54 55.46,50.54 56.22,51.18 59.65,51.18 60.41,50.54 70.83,50.54 70.83,49.53 70.95,48.76 71.34,47.87 71.84,47.11 72.48,46.48 73.24,45.97 74.26,45.59 74.77,45.46 75.4,45.46 75.4,41.65 76.16,41.65 76.16,30.47 75.4,30.47 75.4,27.05 76.16,27.05 76.16,16.12 75.4,16.12 75.4,8.63 74.77,8.63 73.88,8.38 73.49,8.25 72.99,8 72.48,7.62 71.59,6.73 71.21,6.09 70.95,5.2 70.83,4.31 70.83,3.55 50.63,3.55 50.63,4.82 48.09,4.82 48.09,3.55 8.6,3.55 8.6,4.57 8.47,5.2 8.34,5.71 7.96,6.47 7.58,6.98 6.82,7.74 6.18,8.12 5.68,8.38 5.17,8.5 4.53,8.63 3.52,8.63
  pour Top (isolate 0.305, no thermals): 3.52,8.63 3.52,25.65 7.71,25.65 7.71,39.11 3.52,39.11 3.52,45.46 4.66,45.46 5.55,45.72 6.44,46.1 7.07,46.6 8.22,48 8.6,49.53 8.6,50.54 54.7,50.54 55.33,51.18 60.41,51.18 61.05,50.54 70.83,50.54 70.83,49.53 70.95,48.76 71.34,47.87 71.84,47.11 72.48,46.48 73.24,45.97 74.26,45.59 74.77,45.46 75.4,45.46 75.4,41.65 76.16,41.65 76.16,30.47 75.4,30.47 75.4,27.05 76.16,27.05 76.16,16.12 75.4,16.12 75.4,8.63 74.77,8.63 73.49,8.25 72.99,8 71.59,6.73 71.21,6.09 70.95,5.2 70.83,4.31 70.83,3.55 44.29,3.55 42.63,1.9 39.97,1.9 38.57,3.55 8.6,3.55 8.6,4.57 8.34,5.71 7.96,6.47 7.58,6.98 6.82,7.74 5.68,8.38 4.53,8.63
  pour Top: 71.08,41.14 71.08,44.45 74,44.45 74,41.14
  pour Top: 71.21,27.68 71.21,30.73 73.62,30.73 73.62,27.68
  pour Top: 73.24,26.79 73.24,29.84 75.78,29.84 75.78,26.79
  pour Top: 73.24,13.33 73.24,16.38 75.78,16.38 75.78,13.33
  pour Bottom: 68.8,5.71 64.35,5.71 64.35,8.12 68.8,8.12
HAP_FB  (via drill 0.71)
  Top 0.279: v51.52,22.6 U400.8
  Top 0.305: v51.52,22.6 50.76,22.6
  Bottom 0.305: 50.89,23.36 C411.2 50.76,22.73 v51.52,22.6
  Bottom 1.27: 53.05,23.36 R401.2 C407.1 | C411.2 53.05,23.36 | 53.05,23.36 | C407.1 | C407.1 51.02,21.08 50.89,23.11 51.91,23.11 51.91,21.84 50.76,21.84 50.76,22.73 R402.1
HAP_GOOD  (via drill 0.51)
  Top 0.254: U403.2 43.11,28.87 42.84,27.78 40.45,27.78 39.64,27.45 39.2,26.89 39.2,25.78 37.43,25.78 | v45.2,16.89 45.05,17.11 41.24,17.11 40.73,17.65 40.73,22.7 37.76,23.69 37.27,24.2 37.27,24.96 37.43,25.12 37.43,25.78 | 37.43,25.78 37.45,26.94 38.21,27.93 38.21,30.35 39.84,30.35 40.45,30.83 | 40.45,30.83 40.48,30.86 | 40.45,30.83 U402.4
  Bottom 0.305: U406.4 44.45,16.89 v45.2,16.89
HAP_GOOD\  (via drill 0.51)
  Top 0.229: 41.36,32.96 U402.2 | 38.95,33.4 39.71,32.96 41.36,32.96 | 41.36,32.96 42.9,32.96
  Top 0.254: U405.2 37.33,15.36 38.52,15.64 38.52,20.24 38.7,20.42 38.72,20.42 38.7,20.44 38.7,20.49 v38.62,20.57 36.92,20.72 36.92,21.86 35.09,23.18 35.09,23.95 34.99,24.38 34.99,27.53 35.95,27.76 37.43,27.76 37.66,28.04 37.66,30.32 36.16,30.32 35.9,30.73 35.9,31.49 37.43,32.48 37.45,32.89 37.55,33.17 38.06,33.65 38.57,33.65 38.95,33.4 | 42.9,32.96 U401.4
  Bottom 0.254: 41.62,24.1 41.64,24.12 43.32,24.1 43.55,23.77 45.86,23.77 46.93,24.99 46.95,26.41 Q400.4
  Bottom 0.305: v38.62,20.57 38.7,21.2 39.33,21.84 41.62,21.84 41.62,24.1
HAP_PD_TRIGGER  (via drill 0.51)
  Top 0.254: 37.3,46.48 38.06,45.59 38.06,44.19 39.03,43.56 39,42.46 38.06,41.47 37.94,41.17 37.94,38.88 38.72,38.22 38.32,37.66 37.2,36.17 37.17,35.53 35.62,34.06 v34.86,33.55 | R408.2 39.84,29.08 38.95,27.43 38.44,26.92 v38.34,26.72
  Top 0.279: 42.14,29.37 U403.1
  Top 0.305: R407.2 42.13,28.7 42.14,29.37 | 37.3,46.48 37.3,48.89 37.81,49.4 38.7,49.4 39.08,49.02 56.74,49.02 J400.2
  Top 1.27: R407.2 41.95,28.98 41.62,28.95 41.47,28.98 R408.2
  Bottom 0.254: v34.86,33.55 35.07,33.55 35.75,32.66 37.27,32.63 37.43,32.51 38.06,31.62 38.82,30.6 38.82,27.32 v38.34,26.72
HAP_PGOOD  (via drill 0.51)
  Top 0.229: 41.49,32.38 41.21,32.51 39.18,32.51
  Top 0.254: 51.79,21.6 52.41,21.97 52.41,22.98 51.55,25.01 50.43,25.75 50.43,26.64 50.86,27 50.86,31.36 50.1,32.13 C404.2 49.46,31.87 46.95,31.87 46.7,32.76 45.17,32.76 | 45.17,32.76 U401.2 | 45.17,32.76 45.17,30.98 45.05,30.86 43.52,30.86 43.4,30.98 43.4,31.62 42.63,32.38 41.49,32.38 | v38.37,32.61 39.18,32.51
  Top 0.279: 51.79,21.6 U400.6
  Bottom 0.254: v38.37,32.61 38.57,31.75 39.2,30.98 40.07,29.74 R404.2
HAP_RT
  Top 0.254: U400.1 45.64,24.49
  Top 0.305: 45.64,24.49 45.68,23.77
  Top 0.61: 45.68,23.77 45.68,25.27 R405.1
HAP_SHDN\  (via drill 0.51)
  Top 0.254: 50.24,23.6 U400.10 | v45.33,28.8 45.03,28.37 U403.3 43.58,28.37 43.45,28.16 43.24,27.3 40.58,27.3 v40.04,26.66
  Top 0.279: 50.24,23.6 50.38,24.25 v50.43,24.76
  Bottom 0.254: v50.43,24.76 50.25,24.76 49.98,25.29 49.98,27.71 50.13,28.06 | 50.13,28.06 50.17,28.02 Q401.1 | v45.33,28.8 45.55,28.44 49.9,28.44 49.9,28.24 | 49.9,28.24 49.9,27.86 | 49.9,28.24 50.13,28.06 | R404.1 v40.04,26.66
HAP_SW
  Top 0.279: 46.57,22.1 U400.4
  Top 0.305: 46.57,22.1 46.57,20.44 46.06,20.44 46.06,19.43
  Top 1.016: CR400.A 46.06,19.43 45.43,19.43 43.35,17.98 L400.P2
HAP_VC
  Top 0.254: 49.72,27.81 49.87,27.3 49.87,25.52 49.64,25.29 49.64,24.1 49.44,24.05 48.98,23.74 48.98,23.36 49.25,23.1
  Top 0.279: 49.25,23.1 U400.9
  Top 1.27: C409.2 C408.2 49.72,27.81
HAP_VC_FILTER
  Top 0.406: C409.1 52.52,30.6 53.4,30.6 54.32,31.87 R403.2
HO_2101
  Top 0.406: R2101.2 65.49,43.58 65.49,41.78 U2101.7
HO_2102
  Top 0.406: R2102.2 65.24,35.2 65.24,32.76 U2102.7
HO_2103
  Top 0.406: R2103.2 66.74,26.51 65.49,25.27 65.49,23.74 U2103.7
HO_2104
  Top 0.406: R2104.2 66.23,17.24 66.26,16.25 66.26,14.85 67.14,14.35 67.78,14.35
  Top 0.61: 67.78,14.35 U2104.7
HYST  (via drill 0.51)
  Top 0.61: U201.5 23.84,31.24 23.84,29.71 v23.96,29.59 23.84,29.46 R213.2
  Bottom 0.61: R212.2 23.88,29.59 v23.96,29.59
IBAT  (via drill 0.51)
  Top 0.406: U404.P1 46.57,10.83 v46.57,10.59
  Bottom 0.406: Q403.3 47.08,8.99 47.08,10.28 v46.57,10.59
IN_2101
  Top 0.406: U2101.2 60.92,41.78 60.41,42.41 60.41,44.95 R2112.1
  Top 0.61: R2112.1 61.43,44.95 61.43,45.36 Q2105.3
IN_2102
  Top 0.406: R2113.1 60.29,35.81 60.29,33.65 61.18,32.76
  Top 0.61: 61.18,32.76 U2102.2 | Q2106.3 58,35.94 58.51,35.99
  Top 1.016: 60.29,35.81 60.16,35.99 58.51,35.99
IN_2103
  Top 0.406: R2114.1 60.67,26.79 60.67,26.03 60.54,26.03 60.54,24.38 61.18,23.74 U2103.2
  Top 0.61: Q2107.3 58.64,27.15 58.69,27.2 60.67,27.2 60.67,26.79
IN_2104
  Top 0.406: R2115.1 61.56,16.53 61.56,14.98 62.07,14.35 62.45,14.35
  Top 0.61: 62.45,14.35 U2104.2 65.19,14.35 66,13.46 66,11.42 64.73,10.28 Q2108.3
INH.A-D  (via drill 0.51)
  Top 0.406: R2205.1 48.11,43.35 v48.15,43.4
  Bottom 0.254: U2200.5 44.92,38.48 44.92,38.6 45.81,38.6 47.59,40.25 47.59,42.54 v48.15,43.4 48.6,43.76 51.65,43.76 52.29,44.45 56.35,44.45 56.35,43.81 R2206.2
J400_PWR
  Bottom 1.016: J400.1 58.85,47.83 58.09,47.07 R406.1
P_DV1  (via drill 0.51)
  Top 0.61: v58,34.16 57.39,34.45 U2105.4
  Bottom 0.406: C2117.1 58.26,34.41 58.21,34.37 58.04,34.37
  Bottom 0.61: D2110.A 58.04,34.37 v58,34.16
P_DV2
  Bottom 0.305: C2117.2 57.62,31.75 57.11,31.24 57.11,29.46 57.75,28.82 D2111.C | D2112.A 57.11,27.13 57.11,24.76 57.62,24.25 C2119.1
  Bottom 0.406: D2112.A 57.87,27.93
  Bottom 0.61: 57.87,27.93 D2111.C
P_DV3
  Bottom 0.305: C2119.2 57.11,22 57.11,21.13 57.37,20.8 57.75,20.8 58,20.57 58,19.43 57.87,19.3 D2113.C
  Bottom 0.61: 57.87,19.43 D2113.C D2114.A
P_V1
  Bottom 0.305: D2110.C 59.21,31.59 58.64,31.24 58.26,30.86 57.87,30.86 57.87,30.73 | 57.87,30.6 57.87,29.97 58.89,28.7 59.65,28.7 C2116.2
  Bottom 0.406: D2111.A 57.87,30.6 57.87,30.73
  Bottom 1.27: C2116.2 C2118.1
P_V2
  Bottom 0.305: D2113.A 58.21,21.41 59.27,22.35 59.65,22.09 C2120.1 | 59.65,25.01 C2118.2 59.65,25.31
  Bottom 0.61: 59.65,25.31 59.02,25.39 58.51,25.65 57.92,25.65 D2112.C | C2120.1 C2118.2
PIC_CANRX  (via drill 0.51)
  Top 0.406: U300.11 14.61,22.3 v14.31,22.6
  Bottom 0.406: v14.31,22.6 11.39,22.6 11.39,21.08
  Bottom 0.61: U301.4 11.39,21.08
PIC_CANTX  (via drill 0.51)
  Top 0.406: 15.46,22.33 15.46,22.35 | 15.46,22.33 U300.10 | v15.58,19.93 15.46,19.68 15.46,22.33
  Bottom 0.406: U301.1 15.39,19.43 v15.58,19.93
PIC_CLKIN
  Top 0.406: U300.30 20.23,8.2 18.63,6.6 X300.1
  Bottom 1.016: C300.2 14.57,5.08 X300.1
PIC_CLKOUT/10MHZ
  Top 0.406: U300.31 21.03,6.71 X300.2
  Top 0.61: X300.2 24.88,6.6
  Bottom 0.406: U251.2 23.96,10.66 23.33,10.41 21.3,10.41 21.3,6.98 X300.2
  Bottom 1.016: C301.2 22.44,5.07 X300.2
PIC_LAMP
  Top 0.406: 7.2,23.62 SW300.2 7.2,23.49
  Top 0.61: D301.A 7.71,20.23 7.71,23.49
  Top 0.813: SW300.2 7.71,23.49 7.68,23.13 R302.1
  Top 1.27: R302.1 10.12,22.98 9.21,23.52 R303.2 | 7.2,23.49 8.72,23.49 8.72,23.74
PIC_PWR/HAP  (via drill 0.51, 0.71, 0.89)
  Top 0.279: U2100.8 54.45,16.25 54.7,16.63
  Top 0.305: 54.7,18.16 54.7,16.63
  Top 0.406: R300.1 10.02,18.41 v9.74,18.41 | U300.7 17.83,21.04 v16.98,19.93 | U300.28 18.63,9.39 18.12,8.88 17.36,8.88 C302.2 | C251.2 32.1,8.76 v32.35,9.01 33.87,8.12 v34.63,8.12 | U2105.5 52.73,36.25 v51.91,35.33
  Top 0.61: v9.99,9.14 C303.2 | v47.97,17.52 49.67,16 50.89,15.74 50.89,15.23 52.03,15.23 52.03,16.5
  Top 0.813: 7.84,11.55 8.98,10.41 9.84,10.41 | 7.84,11.55 7.83,11.56 | 7.84,11.55 7.83,11.55
  Top 0.838: CF300.3 7.84,11.55
  Top 1.016: R304.1 9.84,10.41
  Top 1.27: R304.1 9.99,10.26 v9.99,9.14 C303.2 | C2101.2 51.75,15.18 52.01,15.44 52.03,16.5 52.03,18.16 | 52.03,18.16 52.03,19.04 | 52.03,19.04 L2100.P1 | 52.03,19.04 52.03,19.81 | 52.03,18.16 54.7,18.16 v54.95,18.16
  Bottom 0.254: R406.2 56.39,45.68 58.13,43.81 R2206.1 56.6,41.65 | C2208.1 56.6,41.65 | U2200.10 54.7,43.56 55.41,42.79 55.41,42.54 55.97,42.03 56.6,41.65
  Bottom 0.305: 25.11,8.5 25.36,8.76 25.87,9.01 25.87,9.14 | 58.13,39.11 58.89,39.11 59.4,38.6 59.4,36.44 58.51,35.55 56.6,35.55 56.1,35.05 56.1,32.76 55.97,32.63 53.85,32.63 U2200.18 53,33.4 | C302.2